# EAGLE board SimpleMasterClock (EAGLE 7.7.0)
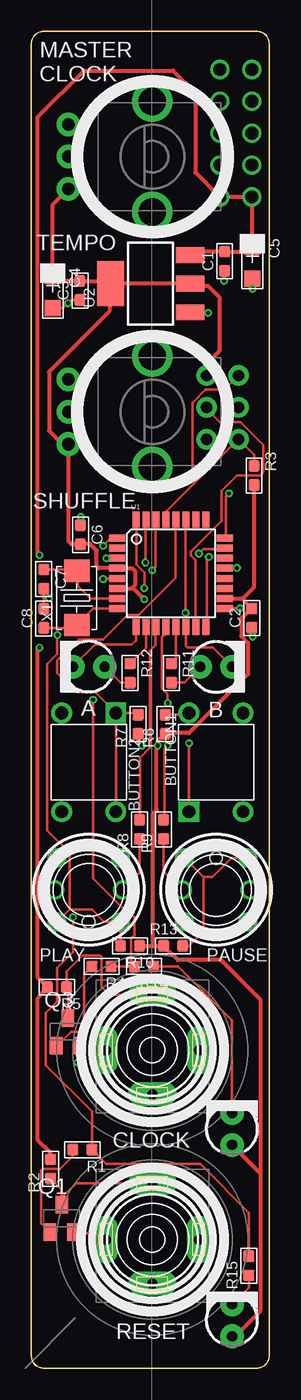
[diagram p0: board, top side]
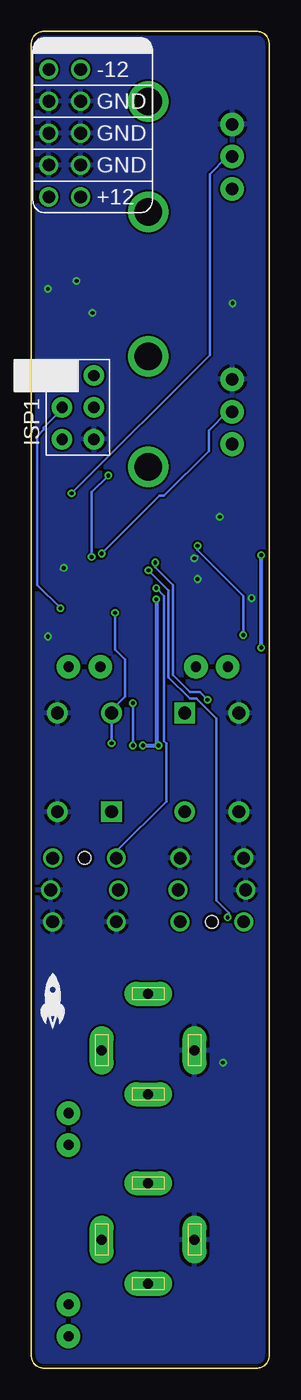
[diagram p1: board, bottom side, seen from below]

Size 18.98 x 106.5 mm. Coordinates in mm from the lower left corner, seen from the top.
Copper layers (1*16): Top 0.035mm / dielectric 1.5mm / Bottom 0.035mm
Design rules "ITEADstudio_DRC": minimum track width 6mil, minimum drill 12mil, track to track 6mil, track to pad 6mil, pad to pad 6mil, via to via 6mil, smd to smd 0mil, copper to edge 10mil, drill to drill 10mil, minimum pad ring 10mil, minimum via ring 6mil, stop-mask expansion 2mil, vias tented up to drill 100mil, thermal gap 10mil
Net classes: 0 default: width 0.203 mm; 1 power: width 0.305 mm

## Footprints (pad centres in the part's own frame; a part is rotated, then mirrored left to right if it is on the bottom)
4P-6.0X6.0X5.0H = drill 1.016 pad 1.651 square: 1 -3.937,2.159 | drill 1.016 pad 1.651: 2 -3.937,-2.159; 3 3.937,-2.159; 4 3.937,2.159
C0603 = smd 0.889 x 0.889: 1 -0.762,0; 2 0.762,0
AVX-A = smd 1.27 x 1.27: + -1.27,0; - 1.27,0
AVRISP = drill 0.9 pad 1.626: 1 -1.27,2.54; 2 1.27,2.54; 3 -1.27,0; 4 1.27,0; 5 -1.27,-2.54; 6 1.27,-2.54
LED3MM = drill 0.813 pad 1.88: A -1.27,0; K 1.27,0
SOT23-BEC = smd 1 x 1.4: B -0.95,-1.1; C 0,1.1; E 0.95,-1.1
R0603 = smd 0.889 x 0.889: 1 -0.762,0; 2 0.762,0
PB6149L = drill 1: 1 2.54,2.54; 2 2.54,-2.54; 3 -2.54,2.54; 4 -2.54,-2.54; LEDNEG 0,-2.7; LEDPOS 0,2.7 | hole 1: 2.54,0
TQFP32-08 = smd 1.27 x 0.559: 1 -4.293,2.8; 2 -4.293,2; 3 -4.293,1.2; 4 -4.293,0.4; 5 -4.293,-0.4; 6 -4.293,-1.2; 7 -4.293,-2; 8 -4.293,-2.8; 17 4.293,-2.8; 18 4.293,-2; 19 4.293,-1.2; 20 4.293,-0.4; 21 4.293,0.4; 22 4.293,1.2; 23 4.293,2; 24 4.293,2.8 | smd 0.559 x 1.27: 9 -2.8,-4.293; 10 -2,-4.293; 11 -1.2,-4.293; 12 -0.4,-4.293; 13 0.4,-4.293; 14 1.2,-4.293; 15 2,-4.293; 16 2.8,-4.293; 25 2.8,4.293; 26 2,4.293; 27 1.2,4.293; 28 0.4,4.293; 29 -0.4,4.293; 30 -1.2,4.293; 31 -2,4.293; 32 -2.8,4.293
SOT223 = smd 1.27 x 2.286: 1 -2.286,-3.175; 2 0,-3.175; 3 2.286,-3.175 | smd 3.556 x 2.159: TER 0,3.175
POWER_10_LABELSOTHERSIDE = drill 1.016: 1 -5.08,-1.27; 2 -5.08,1.27; 3 -2.54,-1.27; 4 -2.54,1.27; 5 0,-1.27; 6 0,1.27; 7 2.54,-1.27; 8 2.54,1.27; 9 5.08,-1.27; 10 5.08,1.27
3.5MM-JACK-SWITCH-13MM-OUTPUT = drill 0.8 pad 1.93 long: RING@3 -3.7,0; SECOND@3 0,-3.5; SWITCH@3 3.7,0; TIP@3 0,4.5
OG-POTS_ALPS_POT_VERTICAL = drill 1 pad 1.88: P$1 -2.58,-6.7; P$2 0,-6.7; P$3 2.58,-6.7 | drill 2.2 pad 3.175: P$4 4.4,0; P$5 -4.4,0
2P-SMD-5.0X3.2 = smd 1.778 x 2.032: 1 -2.159,0; 2 2.159,0

## Placement (x,y rotation side)
BUTTON1  BUTTON-4P-3110040P1  [4P-6.0X6.0X5.0H]  14.74,48.26 90 top
BUTTON2  BUTTON-4P-3110040P1  [4P-6.0X6.0X5.0H]  4.58,48.26 270 top
C1  100nF  [C0603]  15.42,88.19 90 top
C2  100nF  [C0603]  17.58,59.76 90 top
C3  100nF  [C0603]  3.88,85.86 90 top
C4  10uF  [AVX-A]  1.71,85.73 270 top
C5  10uF  [AVX-A]  17.64,88.08 270 top
C6  100nF  [C0603]  3.91,66.39 270 top
C7  22pf  [C0603]  1,62.86 270 top
C8  22pf  [C0603]  1,59.73 90 top
ISP1  AVRISP-6  [AVRISP]  15.26,76.54 0 bottom
LSTART  WHITE  [LED3MM]  14.74,55.88 0 top
LSTART1  WHITE  [LED3MM]  16.01,19.05 90 top
LSTART2  WHITE  [LED3MM]  16.01,3.81 90 top
LSTOP  WHITE  [LED3MM]  4.58,55.88 180 top
Q1  MMBT3904  [SOT23-BEC]  2.42,11.94 0 top
Q3  MMBT3904  [SOT23-BEC]  2.93,26.8 0 top
R1  100k  [R0603]  4.07,17.4 180 top
R2  10k  [R0603]  1.53,15.88 90 top
R3  10k  [R0603]  17.77,71.12 270 top
R4  100k  [R0603]  5.6,32 180 top
R5  10k  [R0603]  2.04,30.35 180 top
R6  10k  [R0603]  10.68,51.31 90 top
R7  10k  [R0603]  8.52,51.31 90 top
R8  50  [R0603]  8.64,42.93 90 top
R9  50  [R0603]  10.55,42.93 90 top
R10  10k  [R0603]  7.88,33.66 180 top
R11  50  [R0603]  11.18,55.37 270 top
R12  50  [R0603]  7.88,55.37 270 top
R13  10k  [R0603]  11.31,33.66 0 top
R14  50  [R0603]  8.99,32 180 top
R15  50  [R0603]  17.34,8.16 90 top
START  SWITCH_W_LED_PB6149L-X-102WHITE  [PB6149L]  4.58,38.1 270 top
STOP  SWITCH_W_LED_PB6149L-X-102WHITE  [PB6149L]  14.74,38.1 90 top
U1  ATMEGA328P  [TQFP32-08]  11.13,63.33 0 top
U2  CJ1117-5.0-1310170P1  [SOT223]  9.5,86.4 90 top
U$1  POWER_SIMPLE10-OTHERSIDE  [POWER_10_LABELSOTHERSIDE]  16.32,98.39 270 bottom
U$2  EURORACK_PCB4HP  [EURORACK4HPPCB]  -0.5,0 0 top
U$3  PJ-341  [3.5MM-JACK-SWITCH-13MM-OUTPUT]  9.66,25.32 0 top
U$4  SPEED  [OG-POTS_ALPS_POT_VERTICAL]  9.66,96.52 270 top
U$5  JUSTATINYROCKET  [JUSTATINYROCKET]  17.28,29.21 0 bottom
U$6  PJ-341  [3.5MM-JACK-SWITCH-13MM-OUTPUT]  9.66,10.24 0 top
U$7  SPEED  [OG-POTS_ALPS_POT_VERTICAL]  9.66,76.2 270 top
X1  CRYSTAL-0500290P1  [2P-SMD-5.0X3.2]  3.62,61.36 90 top

## Library data of the parts
BUTTON1 BUTTON2 START STOP U$5 = zephod-components
C1-C8 R1-R15 U2 X1 = OPL
ISP1 = adafruit
LSTART LSTART1 LSTART2 LSTOP = SparkFun-LED
Q1 Q3 = transistor
U1 = SparkFun-DigitalIC; PROD_ID: IC-09069
U$1 U$2 = EurorackModularParts
U$3 U$6 = EurorackModularParts; DESC: Output; MPN: PJ-341
U$4 = EurorackModularParts; DESC: Tempo
U$7 = EurorackModularParts; DESC: Shuffle

## Nets
5V [power]: C2.2 C3.2 C4.+ C6.2 ISP1.2 LSTART1.A LSTART2.A R3.2 R6.1 R7.1 R10.1 R13.1 U1.4 U1.6 U1.18 U2.2 U2.TER U$4.P$3 U$7.P$3
12V [power]: C1.2 C5.+ R2.2 R5.2 U2.3 U$1.9 U$1.10
BUTTON1: BUTTON1.1 BUTTON1.4 R6.2 U1.27
BUTTON2: BUTTON2.1 BUTTON2.4 R7.2 U1.28
CLOCKJACK: Q3.C R5.1 U$3.TIP@3
CLOCKOUT: R4.1 R14.2 U1.31
CLOCKPOT: U1.24 U$4.P$2
GND: BUTTON1.2 BUTTON1.3 BUTTON2.2 BUTTON2.3 C1.1 C2.1 C3.1 C4.- C5.- C6.1 C7.2 C8.2 ISP1.6 Q1.E Q3.E START.3 START.4 START.LEDNEG STOP.3 STOP.4 STOP.LEDNEG U1.3 U1.5 U1.21 U2.1 U$1.3 U$1.4 U$1.5 U$1.6 U$1.7 U$1.8 U$3.RING@3 U$4.P$1 U$6.RING@3 U$7.P$1
LED1NEG: LSTART.K U1.14
LED1POS: R11.1 U1.13
LED2NEG: LSTOP.K U1.9
LED2POS: R12.1 U1.10
MISO: ISP1.1 U1.16
MOSI: ISP1.4 U1.15
N$1: LSTART.A R11.2
N$2: LSTOP.A R12.2
N$3: R8.1 START.LEDPOS
N$4: R9.1 STOP.LEDPOS
N$5: C7.1 U1.7 X1.2
N$6: C8.1 U1.8 X1.1
N$7: LSTART1.K R14.1
N$8: LSTART2.K R15.1
N$9: Q3.B R4.2
N$12: Q1.B R1.2
RESET: ISP1.5 R3.1 U1.29
RESETJACK: Q1.C R2.1 U$6.TIP@3
RESETOUT: R1.1 R15.2 U1.30
SCK: ISP1.3 U1.17
SHUFFLEPOT: U1.23 U$7.P$2
STARTBUTTON: R10.2 START.1 START.2 U1.1
STARTLED: R8.2 U1.11
STOPBUTTON: R13.2 STOP.1 STOP.2 U1.32
STOPLED: R9.2 U1.12

## Tracks (layer width: path | path; a pad name or v marks a point on that pad's centre or on a via)
5V  (via drill 0.3)
  Top 0.305: U1.18 16.78,61.33 | 16.78,61.33 C2.2 17.46,60.45 16.75,59.74 16.75,58.32 17.28,57.78 17.28,55.3 12.57,50.58 10.79,50.58 R6.1 10.61,50.49 10.08,49.96 v10.08,49.61 9.99,49.52 9.99,44.45 9.72,44.18 9.72,33.66 | U2.TER U2.2 12.84,86.23 14.11,86.23 14.99,85.34 14.99,81.03 13.99,80.02 ISP1.2 | U2.TER 5.68,86.4 5.47,86.61 | U2.TER 6.11,86.62 C3.2 2.1,86.62 C4.+ 1.71,92.69 U$4.P$3 | R10.1 9.72,33.66 | 9.72,33.66 R13.1 11.69,32.51 15.12,32.51 18.3,29.34 18.3,15.49 | 8.09,62.18 8.26,62.36 8.26,63.5 8.04,63.73 U1.4 5.37,63.73 5.21,63.88 5.21,65.15 4.71,65.66 3.94,65.66 C6.2 3.21,65.63 2.96,65.88 U$7.P$3 2.46,73.62 1.41,74.68 1.41,79.38 6.23,84.2 6.23,86.3 U2.TER | 8.09,62.18 8.03,62.12 U1.6 | 16.78,61.33 16.88,61.33 17.79,62.23 17.79,70.34 R3.2 | LSTART2.A 16.26,2.54 18.3,4.57 18.3,15.49 | 18.3,15.49 LSTART1.A | v8.84,49.61 8.57,49.87 8.57,50.49 R7.1 | 8.09,62.18 v9.01,61.25
  Bottom 0.305: v10.08,49.61 v8.84,49.61 9.01,49.7 v9.01,61.25
12V  (via drill 0.3)
  Top 0.305: U2.3 12.94,88.95 C1.2 17.23,88.95 C5.+ 17.59,89.4 U$1.9 U$1.10 13.09,95.27 13.09,101.6 11.31,103.38 4.2,103.38 0.52,99.69 0.52,64.9 v0.64,64.77 | R2.2 1.53,17.14 0.52,18.16 0.52,29.46 R5.2 0.52,31.11 0.52,57.28 v0.64,57.4
  Bottom 0.305: v0.64,57.4 v0.64,64.77
BUTTON1  (via drill 0.3)
  Top 0.203: v12.3,60.19 12.3,67.56 U1.27 | BUTTON1.1 v12.58,49.78 | R6.2 12.45,52.07 BUTTON1.4
  Bottom 0.203: v12.3,60.19 12.3,57.25 11.5,56.45 11.5,53.52 12.57,52.45 12.57,52.39 | 12.57,52.39 12.57,52.27 12.52,52.23 | v12.58,49.78 BUTTON1.4 12.52,52.39 12.57,52.39
BUTTON2
  Top 0.203: BUTTON2.1 8.39,52.2 R7.2 | 4.1,53.87 5.1,53.87 6.7,52.27 BUTTON2.1 | 4.1,53.87 3.59,53.87 2.08,55.38 2.08,56.36 3.77,58.05 5.72,58.05 7.68,60.01 8.57,60.01 11.5,62.94 11.5,67.56 U1.28 | 6.79,52.18 BUTTON2.1 | 4.1,53.82 4.1,53.87 | BUTTON2.1 BUTTON2.4
CLOCKJACK
  Top 0.203: Q3.C 2.93,30.23 R5.1 2.8,31.62 4.07,32.89 5.47,32.89 5.6,32.77 5.6,30.35 6.23,29.72 9.55,29.72 U$3.TIP@3
CLOCKOUT  (via drill 0.3)
  Top 0.203: R4.1 R14.2 7.95,32.09 7.95,34.23 8.21,34.49 8.21,35.92 7.5,36.63 7.32,36.63 4.92,39.03 v4.92,53.25 | v9.1,64.19 9.1,67.56 U1.31
  Bottom 0.203: v9.1,64.19 9.1,63.83 7.68,62.41 7.68,55.21 6.34,53.87 5.54,53.87 v4.92,53.25
CLOCKPOT  (via drill 0.3)
  Top 0.203: v15.77,69.7 15.5,69.43 15.5,66.14 U1.24
  Bottom 0.203: v15.77,69.7 4.75,80.72 4.75,95.12 3.41,96.46 2.97,96.46 U$4.P$2
GND  (via drill 0.3)
  Top 0.203: Q3.E 3.69,25.27 v3.69,24.33 | C7.2 1,61.41 | 1,61.41 C8.2 | 1,61.41 1.15,61.34 v1.41,61.34 | U1.5 5.78,62.92 v5.72,62.87 | U1.3 v5.99,64.53 v5.98,64.52 | C6.1 3.91,67.79 v3.95,67.82 | C2.1 17.58,58.37 v17.66,58.29 | U1.21 16.36,63.73 v16.39,63.75 | C3.1 3.19,85.09 v2.93,84.84 2.56,84.46 C4.- | C5.- 17.64,86 v17.66,85.98 | C1.1 15.42,86.66 v15.38,86.61 | U2.1 14.07,84.11 v14.11,84.07 | Q1.E 3.41,10.76 5.46,10.76 5.9,10.31 U$6.RING@3
  Bottom 0.203: v3.69,24.33 3.69,24.21 | v1.41,61.34 1.28,61.34 1.41,61.21 | v5.72,62.87 5.6,62.87 | v5.98,64.52 5.85,64.52 5.72,64.64 | v3.95,67.82 3.95,67.94 | v17.66,58.29 17.66,58.04 | v16.39,63.75 16.52,63.75 16.64,63.63 | v2.93,84.84 2.93,84.58 | v17.66,85.98 17.53,85.85 | v15.38,86.61 15.38,86.49 | v14.11,84.07 14.23,84.07
  pour Bottom: -1.77,107.95 21.09,107.95 21.09,-1.27 -1.77,-1.27
LED1NEG
  Top 0.203: U1.14 12.34,57.52 12.45,57.4 14.49,57.4 LSTART.K
LED1POS
  Top 0.203: U1.13 11.54,56.48 R11.1
LED2NEG
  Top 0.203: U1.9 8.34,57.98 8.01,57.66 5.09,57.66 LSTOP.K
LED2POS
  Top 0.203: U1.10 9.13,57.39 R12.1
MISO  (via drill 0.3)
  Top 0.203: v14.17,64.63 13.99,64.45 13.99,59.12 U1.16 | v12.84,71.12 12.84,76.9 13.9,77.97 15.41,77.97 16.48,79.03 ISP1.1
  Bottom 0.203: v14.17,64.63 14.17,69.79 v12.84,71.12
MOSI
  Top 0.203: U1.15 13.1,59.12 13.1,64.36 12.75,64.72 12.75,65.08 15.15,67.47 15.15,69.88 16.39,71.12 18.26,71.12 18.52,71.39 18.52,73.52 16.66,75.39 15.06,75.39 13.99,76.45 ISP1.4
N$1
  Top 0.203: R11.2 12.2,54.61 LSTART.A
N$2
  Top 0.203: R12.2 7.12,54.61 LSTOP.A
N$3
  Top 0.203: R8.1 8.64,39.46 START.LEDPOS
N$4
  Top 0.203: R9.1 10.55,39.59 STOP.LEDPOS
N$5
  Top 0.203: C7.1 3.52,63.62 X1.2 3.69,63.45 3.69,62.36 4.72,61.33 U1.7
N$6
  Top 0.203: C8.1 3.39,58.97 X1.1 4.95,60.52 U1.8
N$7
  Top 0.203: R14.1 11.7,32 16.01,27.69 LSTART1.K
N$8
  Top 0.203: R15.1 17.34,6.41 LSTART2.K
N$9
  Top 0.203: Q3.B 2.08,25.7 3.18,26.8 3.82,26.8 4.2,27.18 4.2,31.37 R4.2
N$12
  Top 0.203: R1.2 3.31,16.89 2.29,15.88 0.9,15.88 0.77,15.75 0.77,11.54 Q1.B
RESET
  Top 0.203: R3.1 17.77,72.76 ISP1.5 16.48,73.97 10.79,68.28 10.79,67.65 U1.29
RESETJACK
  Top 0.203: Q1.C 2.42,13.59 | 2.42,13.59 2.42,14.22 R2.1 | U$6.TIP@3 3.57,14.74 2.42,13.59
RESETOUT  (via drill 0.3)
  Top 0.203: R15.2 17.34,12.39 13.47,16.26 5.98,16.26 R1.1 4.83,20.45 1.15,24.13 1.15,28.32 2.04,29.21 2.04,31.88 3.32,33.16 v3.32,35.92 | v9.63,63.56 9.9,63.83 9.9,67.56 U1.30
  Bottom 0.203: v9.63,63.56 8.03,61.96 8.03,55.03 6.34,53.34 5.81,53.34 4.21,51.74 4.21,37.25 3.23,36.27 3.23,36.01 v3.32,35.92
SCK  (via drill 0.3)
  Top 0.203: v16.66,60.54 15.5,60.54 U1.17
  Bottom 0.203: v16.66,60.54 18.52,62.41 18.52,74.23 17.99,74.77 17.99,74.94 16.48,76.45 ISP1.3
SHUFFLEPOT  (via drill 0.3)
  Top 0.203: v13.37,64.9 13.72,65.25 15.41,65.25 U1.23
  Bottom 0.203: v13.37,64.9 8.75,69.52 8.39,69.52 4.83,73.08 4.83,74.68 3.32,76.19 2.97,76.19 U$7.P$2
STARTBUTTON  (via drill 0.3)
  Top 0.203: R10.2 START.1 5.81,35.56 4.83,36.54 3.06,36.54 | v5.72,65.52 6.26,66.05 6.79,66.05 U1.1 | v2.08,58.41 2.08,56.9 1.28,56.1 1.28,42.85 3.06,41.07 3.06,36.54 | 3.06,36.54 2.08,35.56 START.2
  Bottom 0.203: v5.72,65.52 5.72,65.16 2.08,61.52 v2.08,58.41
STARTLED
  Top 0.203: R8.2 8.66,43.74 8.66,48.63 9.46,49.43 9.46,57.16 9.9,57.61 9.9,59.03 U1.11
STOPBUTTON  (via drill 0.3)
  Top 0.203: R13.2 12.58,33.66 13.72,34.8 13.72,39.12 | 13.72,39.12 STOP.1 | v9.01,62.14 9.01,63.39 8.39,64.01 8.39,67.56 U1.32 | 13.72,39.12 14.44,39.12 15.95,40.63 17.28,40.63 STOP.2
  Bottom 0.203: v9.01,62.14 8.39,61.52 8.39,49.96 8.21,49.78 8.21,45.16 12.12,41.25 12.12,40.72 STOP.1
STOPLED  (via drill 0.3)
  Top 0.203: v10.88,49.61 10.61,49.34 10.61,43.74 R9.2 | v10.88,52.98 10.88,53.7 10.44,54.14 10.44,58.23 10.7,58.5 10.7,59.03 U1.12
  Bottom 0.203: v10.88,52.98 v10.88,49.61

## Text on the board
tPlace: MASTER / CLOCK | TEMPO | SHUFFLE | A | B | PLAY | PAUSE | CLOCK | RESET